# Altium PCB OBD-2 ESP32 Shield.PcbDoc
Units mm, origin at the board's own origin, x right, y up, seen from the top; angles counter-clockwise.
Board outline 59.1 x 44.1 mm, 2 copper layers (L1, L2), stack 1.58 mm thick; 40 components, 28 nets, 142 pads, 52 vias.
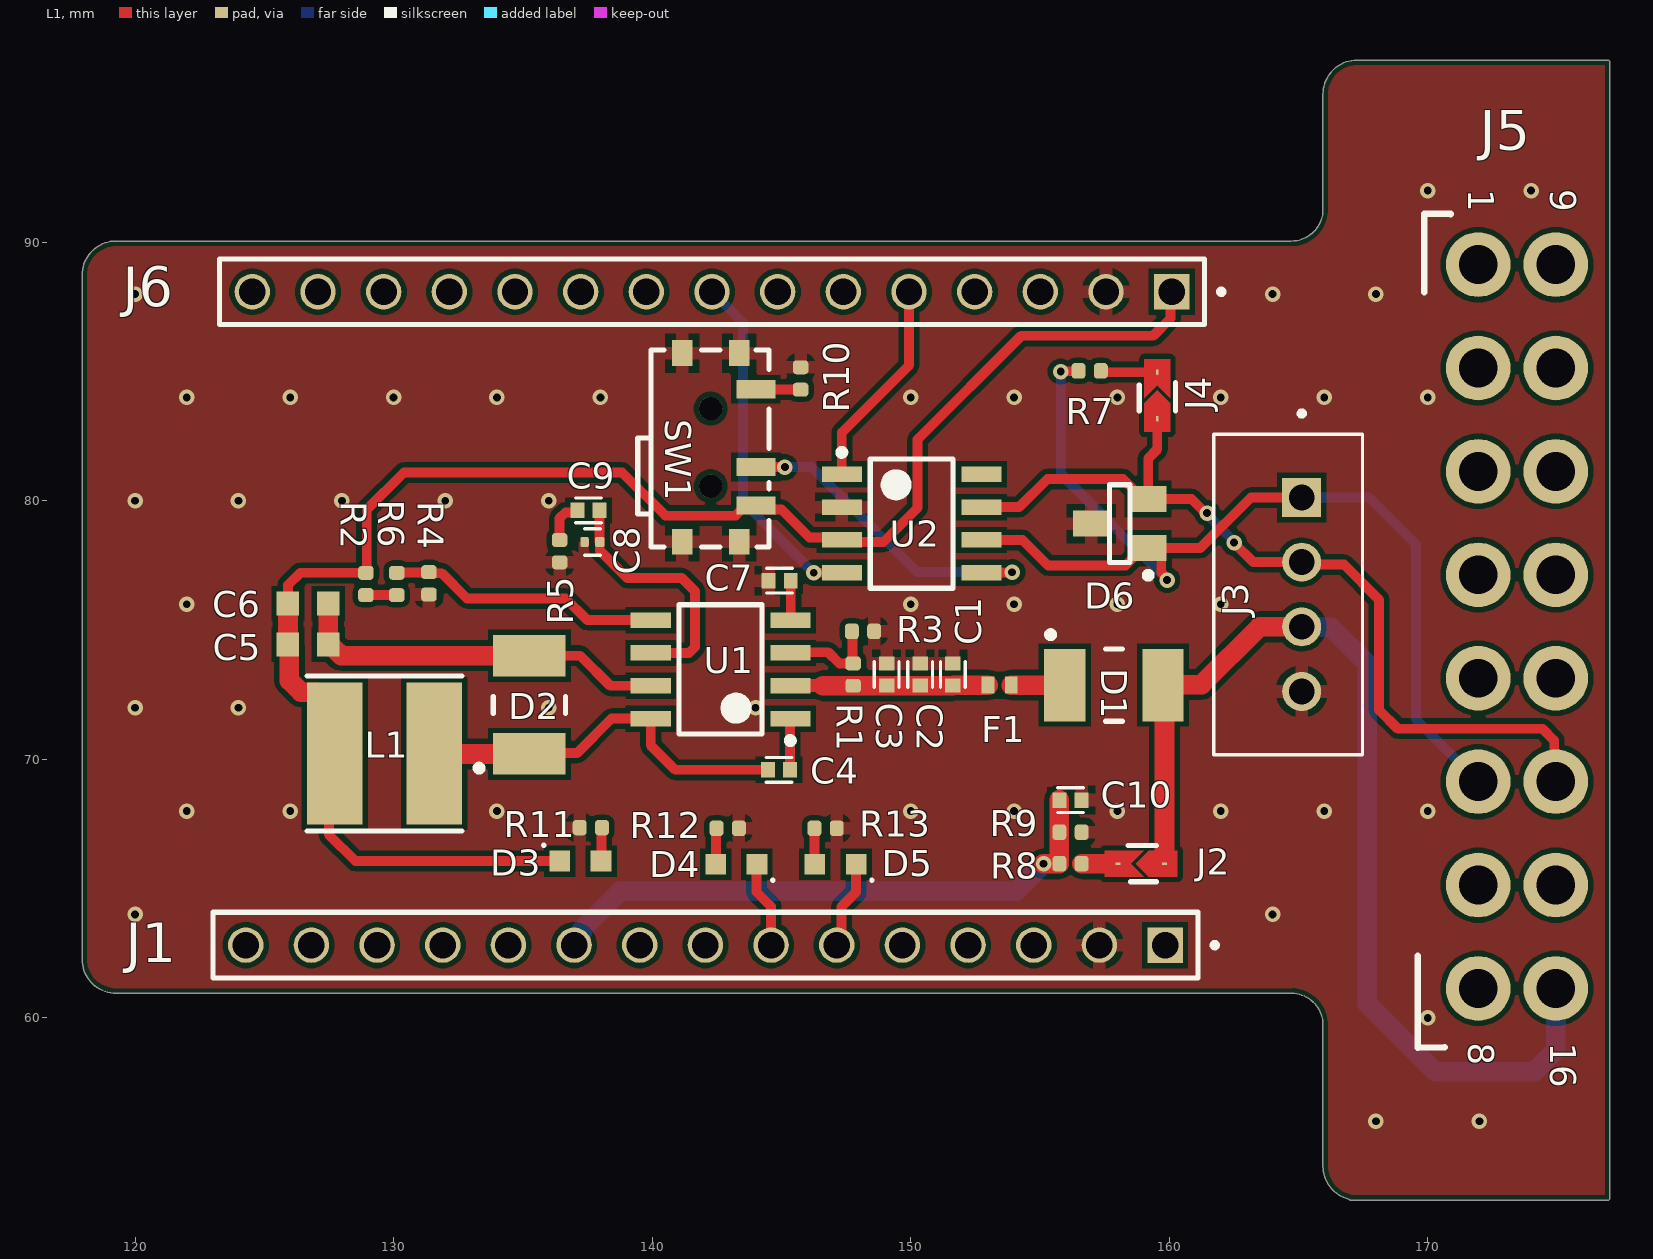
[diagram p0: L1 view]
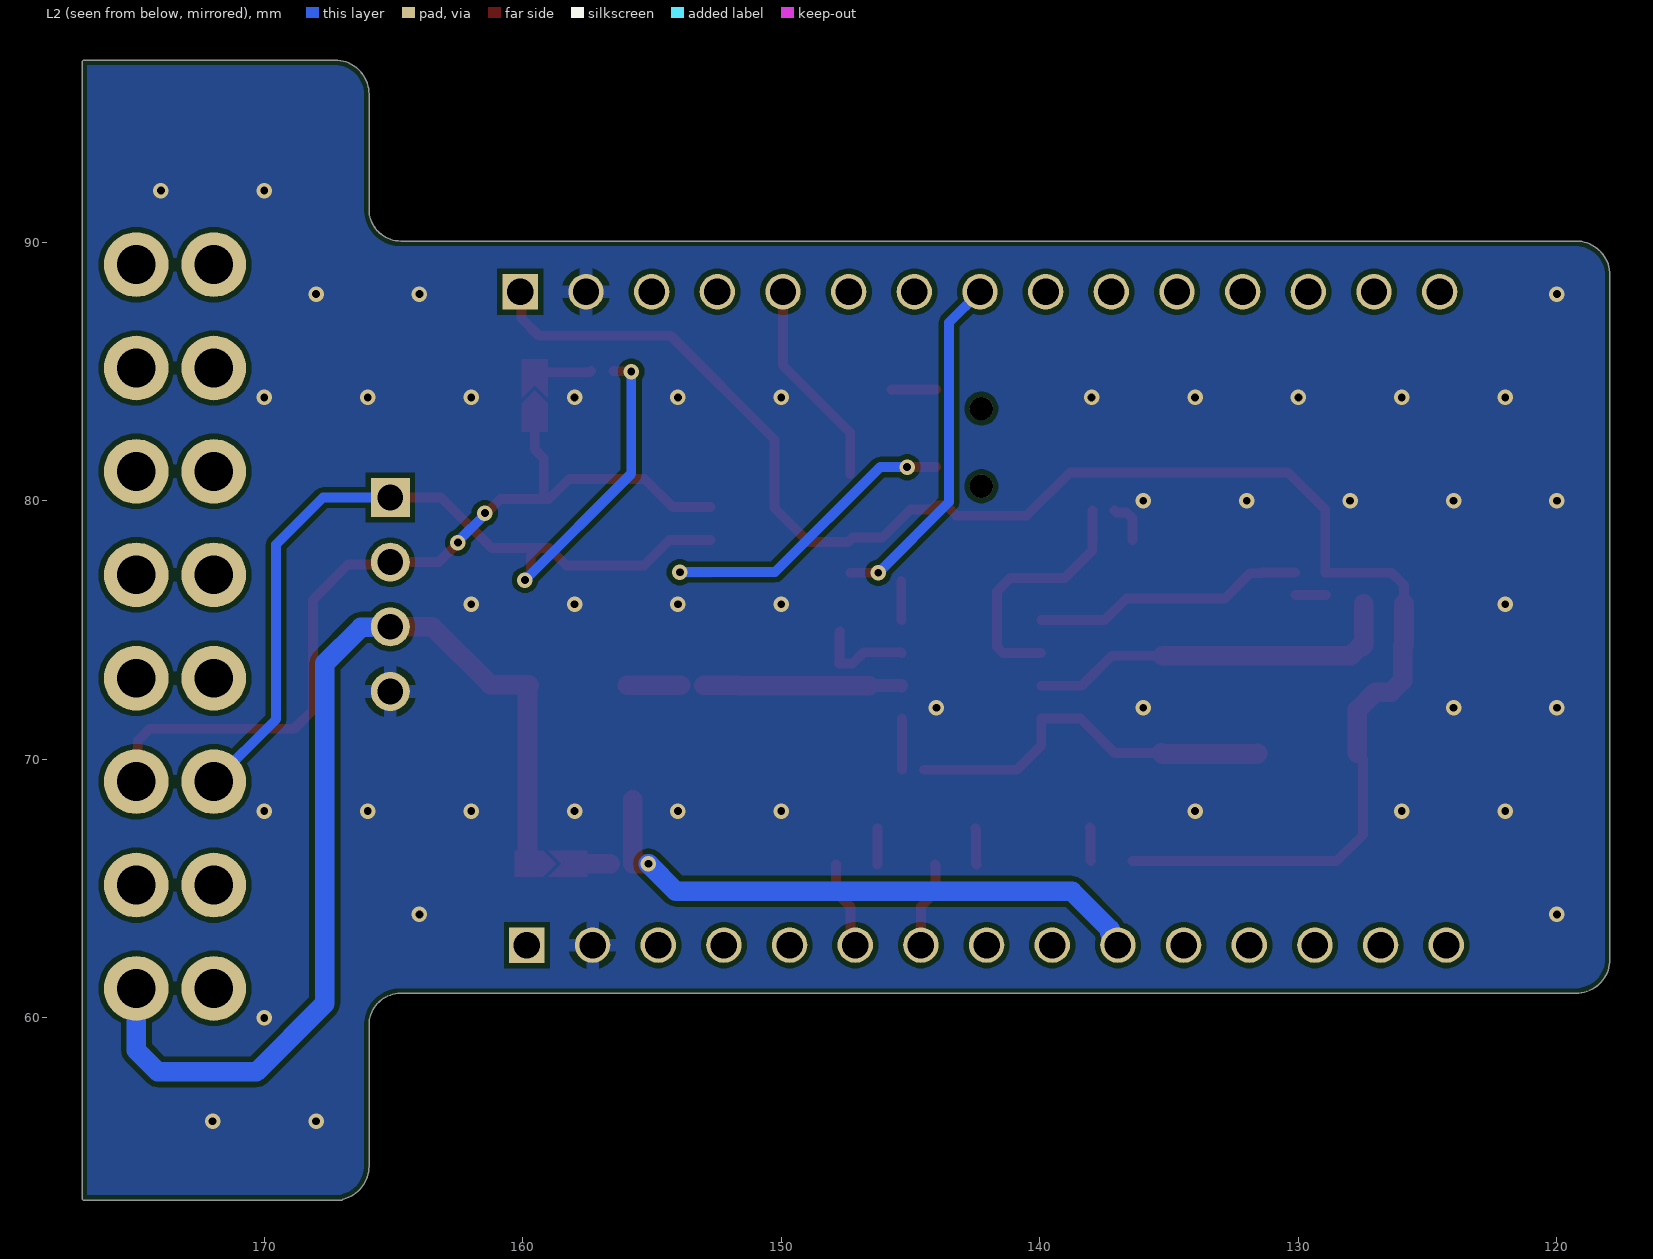
[diagram p1: L2 view, seen from below]
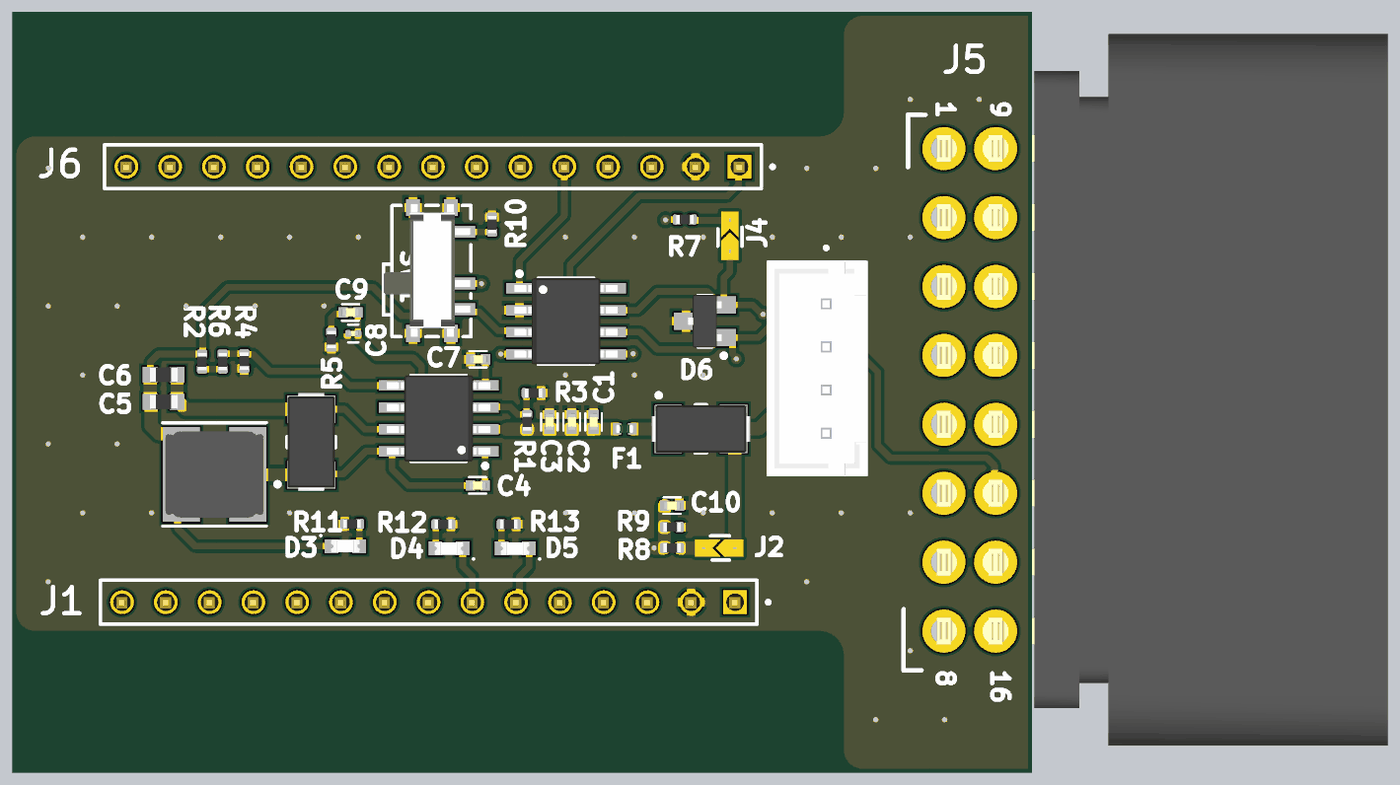
[diagram p2: 3D render of the assembled board from above, using the file's embedded part models]

## Layer stack, top to bottom
Top Solder: solder mask 0.0102, Solder Resist, Dk 3.5
L1: signal copper 0.04
Dielectric 1: dielectric 1.5, FR-4, Dk 4.8
L2: signal copper 0.04
Bottom Solder: solder mask 0.0102, Solder Resist, Dk 3.5

## Board outline
117.95,62.27 ccw(c119.27,62.27) 119.27,60.95 164.73,60.95 cw(c164.73,59.73) 165.95,59.73 165.95,54.27 ccw(c167.27,54.27) 166.951,52.989 167,52.95 177,52.95 177.05,53 177.05,97 177,97.05 167.27,97.05 ccw(c167.27,95.73) 165.95,95.73 165.95,91.27 cw(c164.73,91.27) 164.73,90.05 119.27,90.05 ccw(c119.27,88.73) 117.95,88.73

## Design rules (kind name [scope] priority, off if disabled: settings)
BoardOutlineClearance [All] p1: gap=0.2 ignorepadtopadclearanceinfootprint=FALSE except(0.4: Arc-SplitBarrior Arc-SplitContinuation Track-SplitBarrior Track-SplitContinuation SMDPad-SplitBarrior SMDPad-SplitContinuation THPad-SplitBarrior THPad-SplitContinuation Via-SplitBarrior Via-SplitContinuation Fill-SplitBarrior Fill-SplitContinuation Poly-SplitBarrior Poly-SplitContinuation Region-SplitBarrior Region-SplitContinuation Text-SplitBarrior Text-SplitContinuation)
Clearance "Clearance Bottom Layer" [OnLayer('Bottom Layer')] p1: gap=0.203 ignorepadtopadclearanceinfootprint=TRUE except(0.254: Arc-Text Track-Text SMDPad-Text THPad-Text Via-Text Fill-Text Poly-Text Region-Text Text-Text)
Clearance "Clearance Top Layer" [OnLayer('Top Layer')] p2: gap=0.203 ignorepadtopadclearanceinfootprint=TRUE except(0.254: Arc-Text Track-Text SMDPad-Text THPad-Text Via-Text Fill-Text Poly-Text Region-Text Text-Text)
Clearance [All] p3: gap=0.2 ignorepadtopadclearanceinfootprint=FALSE except(0.089: Arc-Arc Arc-Track Arc-SMDPad Track-Track Track-SMDPad SMDPad-SMDPad; 0.127: Arc-Via Track-Via SMDPad-Via THPad-Via Via-Via; 0.254: Arc-Text Track-Text SMDPad-Text THPad-Text Via-Text Fill-Text Poly-Text Region-Text Text-Text)
HoleSize [All] p1: absolutevalues=TRUE maxlimit=6.3 minlimit=0.2 maxpercent=80.000 minpercent=20.000
MinimumAnnularRing [All] p1: minimumring=0.076
MinimumSolderMaskSliver [All] p1: minsoldermaskwidth=0.1
PolygonConnect PolygonConnect_3 [All vs IsNamedPolygon('BATT_BB_L01_P002')] p1: connectstyle=Direct reliefconductorwidth=0.254 reliefentries=4 polygonreliefangle="90 Angle" airgapwidth=0.254
PolygonConnect PolygonConnect_2 [All vs IsNamedPolygon('BATT_BB_L02_P001')] p2: connectstyle=Direct reliefconductorwidth=0.254 reliefentries=4 polygonreliefangle="90 Angle" airgapwidth=0.254
PolygonConnect [All vs IsNamedPolygon('VIN_REG_L02_P000')] p3: connectstyle=Direct reliefconductorwidth=0.254 reliefentries=4 polygonreliefangle="90 Angle" airgapwidth=0.254
PolygonConnect PolygonConnect_1 [All] p4: thpad.connectstyle=Relief thpad.reliefconductorwidth=0.508 thpad.reliefentries=4 thpad.polygonreliefangle="90 Angle" thpad.airgapwidth=0.254 smdpad.connectstyle=Relief smdpad.reliefconductorwidth=0.508 smdpad.reliefentries=4 smdpad.polygonreliefangle="90 Angle" smdpad.airgapwidth=0.254 via.connectstyle=Direct via.reliefconductorwidth=0.508 via.reliefentries=4 via.polygonreliefangle="90 Angle" via.airgapwidth=0.254
RoutingCorners [All] p1: cornerstyle=Round minsetback=2.54 maxsetback=2.54
RoutingVias [All] p1: holewidth=0.5 width=1 viastyle="Through Hole" minholewidth=0.2 minwidth=0.45 maxholewidth=1 maxwidth=2
SilkToSilkClearance [All] p1: silktosilkclearance=0.1
SilkToSolderMaskClearance [IsPad] p1: minsilkscreentomaskgap=0.1 clearancetoexposedcopper=TRUE
SolderMaskExpansion [All] p1: expansion=0.102 istentingtop=FALSE
Width [All] p1: maxlimit=2.54 minlimit=0.089 preferedwidth=0.381
25 further rules are at their usual default settings.

## Components (designator, comment, footprint, x,y, rotation, side; value= is the part's Value field where it differs from the comment)
C1 "GRM155R61E475ME15D" CAP0402_1005 151.638,73.279 r270 top value=4u7
C2 "GRM155R61E475ME15D" CAP0402_1005 150.368,73.279 r270 top value=4u7
C3 "GRM155R71E103KA01D" CAP0402_1005 149.073,73.279 r270 top value=10n
C4 "GRM155R62A104KE14D" CAP0402_1005 144.907,69.596 r180 top value=100n
C5 "GRM188R60J476ME15D" RES0603_1608 126.695,74.447 r180 top value=47u
C6 "GRM188R60J476ME15D" RES0603_1608 126.695,76.022 r180 top value=47u
C7 "GRM155R71E103KA01D" CAP0402_1005 144.932,76.911 r0 top value=10n
C8 "CC0201KRX7R9BB470" CAP0201_0603 137.694,78.41 r0 top value=47p
C9 "GCM155L81H102KA37D" CAP0402_1005 137.541,79.629 r0 top value=1n
C10 "GRM155R62A104KE14D" CAP0402_1005 156.185,68.428 r180 top value=100n
D1 "B340A" SMA(DO-214AC) 157.861,72.873 r0 top
D2 "B340A" SMA(DO-214AC) 135.255,72.111 r90 top
D3 "XL-TD1608SURC" LED0603 137.224,66.065 r0 top value=Red
D4 "XL-TD1608UYC" LED0603 143.256,65.938 r180 top value=Yellow
D5 "XL-TD1608UBC" LED0603 147.091,65.938 r180 top value=Blue
D6 "NUP2105LT1G" SOT-23 158.09,79.121 r180 top
F1 "JFC0402-0500FS" "FUSE SMD 0402" 153.441,72.873 r180 top
J1 "Conn 1x15, 2.45mm" "1-ROW, 15-POSITION, 2.54MM" 159.842,62.814 r180 top locked net-tie value="Conn 1x15, 2.54mm"
J2 "Jumper" JP0603 159.817,65.964 r180 top net-tie
J3 "HCZZ0139-4" "CONNECTOR PUSH-PULL, 2.54MM" 164.603,76.378 r90 top locked
J4 "Jumper" JP0603 159.541,83.176 r90 top net-tie
J5 "OBD2 Connector" COMTECH_C-OBD-II-16M 171.955,89.139 r90 top locked
J6 "Conn 1x15, 2.45mm" "1-ROW, 15-POSITION, 2.54MM" 160.096,88.087 r180 top locked net-tie value="Conn 1x15, 2.54mm"
L1 "CY54-6.8UH" SMD,5.8X5.2MM 129.647,70.231 r180 top value=6.8u
R1 "RC0402FR-07332KL" RES0402_1005 147.777,73.279 r270 top value=332k
R2 "PA0402-R-070RL" RES0402_1005 128.93,76.784 r90 top value=0R
R3 "RC0402FR-0768K1L" RES0402_1005 148.158,74.955 r180 top value=68.1k
R4 "RT0402BRD0710K2L" RES0402_1005 130.124,76.784 r270 top value=10.2k
R5 "AT0402DRD0729K4L" RES0402_1005 136.423,78.054 r90 top value=29.4k
R6 "AT0402DRD073K24L" RES0402_1005 131.369,76.809 r90 top value=3.24k
R7 "RT0402FRE07120RL" RES0402_1005 156.925,85.027 r180 top value=120R
R8 "RC0402JR-071ML" RES0402_1005 156.185,65.964 r0 top value=1M
R9 "RC0402FR-07270KL" RES0402_1005 156.185,67.183 r180 top value=270k
R10 "RT0402DRD0710KL" RES0402_1005 145.745,84.734 r90 top value=10k
R11 "RT0402BRE071KL" RES0402_1005 137.63,67.361 r0 top value=1k
R12 "RT0402BRE071KL" RES0402_1005 142.926,67.335 r180 top value=1k
R13 "RT0402BRE071KL" RES0402_1005 146.71,67.335 r180 top value=1k
SW1 "SSSS811101" SMD-SWITCH 144.015,84.316 r270 top
U1 "TPS54331DR" SOIC-8 142.646,73.482 r180 top
U2 "SN65HVD230DR" SOIC-8 150.038,79.121 r0 top

## Footprints (in the part's own frame and the unit in brackets; to place one, negate y for a bottom-side part, rotate by r counter-clockwise, add the part's x,y. Pads: shape width x height; smd on the part's side, far side on the other; paste and mask are expansions set on the pad)
"1-ROW, 15-POSITION, 2.54MM" [mm]
  rect 1.37x1.37 / inner round 1.37 / far side rect 1.37x1.37 hole 1.02: 1(0,0)
  round 1.37 hole 1.02: 2(2.54,0) 3(5.08,0) 4(7.62,0) 5(10.16,0) 6(12.7,0) 7(15.24,0) 8(17.78,0) 9(20.32,0) 10(22.86,0) 11(25.4,0) 12(27.94,0) 13(30.48,0) 14(33.02,0) 15(35.56,0)
  silkscreen extent -2.02,-1.27 36.83,1.27, body extent -1.25,-1.24 36.85,1.3, height 8.5
CAP0201_0603 [mm]
  rrect50% 0.33x0.4 smd: 1(-0.305,0)
  rrect50% 0.38x0.4 smd: 2(0.28,0)
  silkscreen extent -0.3,-0.52 0.3,0.52, body extent -0.3,-0.15 0.3,0.15, height 0.3
CAP0402_1005 [mm]
  rect 0.54x0.6 smd: 1(-0.43,0) 2(0.43,0)
  silkscreen extent -0.5,-0.48 0.5,0.48, body extent -0.5,-0.24 0.5,0.26, height 0.5
COMTECH_C-OBD-II-16M [mm]
  round 2.5 hole 1.5: 1(0,0) 2(-4,0) 3(-8,0) 4(-12,0) 5(-16,0) 6(-20,0) 7(-24,0) 8(-28,0) 9(0,-3) 10(-4,-3) 11(-8,-3) 12(-12,-3) 13(-16,-3) 14(-20,-3) 15(-24,-3) 16(-28,-3)
  silkscreen extent -30.29,1.07 1.97,2.33, body extent -34.65,-25.75 6.65,0.4, height 2.6
"CONNECTOR PUSH-PULL, 2.54MM" [mm]
  rect 1.508x1.508 / inner round 1.508 / far side rect 1.508x1.508 hole 1: 1(3.75,-0.525)
  round 1.508 hole 1: 2(1.25,-0.525) 3(-1.25,-0.525) 4(-3.75,-0.525)
  silkscreen extent -6.2,-2.88 7.1,2.88, body extent -6.2,-2.88 6.2,2.88, height 7
"FUSE SMD 0402" [mm] "Chip Resistor, 2-Leads, Body 1.00x0.50mm, IPC Medium Density"
  rect 0.5x0.65 smd: 1(-0.45,0) 2(0.45,0)
  body extent -0.51,-0.25 0.51,0.25, height 0.51
JP0603 [mm]
  rrect50% 0.2x0.1 smd mask+0.102: 1(0,0) 2(1.8,0)
  L1 region: 0.8,0.5 1.3,0 0.8,-0.5 2.3,-0.5 2.3,0.5
  L1 region: -0.5,-0.5 -0.5,0.5 0.6,0.5 1.1,0 0.6,-0.5
  silkscreen extent 0.3,-0.7 1.4,0.7
LED0603 [mm]
  rect 0.8x0.8 smd: 1(-0.8,0) 2(0.8,0)
  silkscreen extent -1.46,0.56 -1.36,0.66, body extent -0.81,-0.36 0.84,0.37, height 0.68
RES0402_1005 [mm]
  rrect50% 0.54x0.6 smd: 1(-0.432,0) 2(0.432,0)
  body extent -0.5,-0.28 0.5,0.28, height 0.4
RES0603_1608 [mm]
  rect 0.87x0.93 smd: 1(-0.78,0) 2(0.78,0)
  body extent -0.8,-0.43 0.8,0.43, height 0.6
SMA(DO-214AC) [mm] "Molded Diode, 2-Leads, Body 5.04x2.60mm, IPC Medium Density"
  rect 1.6x2.8 smd: 1(-1.9,0) 2(1.9,0)
  silkscreen extent -2.57,-1.4 0.33,2.07, body extent -2.86,-1.38 2.86,1.38, height 2.42
SMD,5.8X5.2MM [mm]
  rect 2.15x5.5 smd: 1(-1.925,0) 2(1.925,0)
  silkscreen extent -3,-3 3,3, body extent -2.85,-2.5 2.85,2.5, height 4.7
SMD-SWITCH [mm]
  rect 0.7x1.5 smd: 1(0,0) 2(3,0) 3(4.5,0)
  rect 1x0.8 smd: 4(-1.4,-0.65) 5(5.9,-0.65) 6(5.9,-2.85) 7(-1.4,-2.85)
  round 0.9 hole 0.9 paste-1 mask-1: NC(0.75,-1.75) NC(3.75,-1.75)
  silkscreen extent -1.52,-4.57 6.1,0.51, body extent -1.61,-4.54 6.09,0.46, height 1.4
SOIC-8 [mm] "SOIC, 8-Leads, Body 4.90x3.90mm, Pitch 1.27mm, IPC Medium Density"
  rect 1.55x0.6 smd: 1(-2.7,1.905) 2(-2.7,0.635) 3(-2.7,-0.635) 4(-2.7,-1.905) 5(2.7,-1.905) 6(2.7,-0.635) 7(2.7,0.635) 8(2.7,1.905)
  silkscreen extent -2.83,-2.5 1.6,2.88, body extent -3,-2.5 3,2.5, height 1.75
SOT-23 [mm] "SOT223, 3-Leads, Body 2.92x2.37mm (avg), Pitch 1.90mm, IPC Medium Density"
  rect 1.4x1 smd: 1(-1.1,0.95) 2(-1.1,-0.95) 3(1.1,0)
  silkscreen extent -1.23,-1.5 0.4,2.12, body extent -0.97,-1.52 0.97,1.52, height 1.12

## Part data
C1 C2: "25V 4.7uF X5R 0402 Multilayer Ceramic Capacitors MLCC - SMD/SMT ROHS", LCSC Part #=C2858031, Mfr Name="Murata Electronics", Mfr.Part #=GRM155R61E475ME15D
C3 C7: "25V 10nF X7R ±10% 0402 Multilayer Ceramic Capacitors MLCC - SMD/SMT ROHS", LCSC Part #=C77013, Mfr Name="Murata Electronics", Mfr. Part #=GRM155R71E103KA01D
C4 C10: "100V 100nF X5R ±10% 0402 Multilayer Ceramic Capacitors MLCC - SMD/SMT ROHS", LCSC Part #=C162178, Mfr Name="Murata Electronics", Mfr. Part #=GRM155R62A104KE14D
C5 C6: "6.3V 47uF X5R ±20% 0603 Multilayer Ceramic Capacitors MLCC - SMD/SMT ROHS", LCSC Part #=C140782, Mfr Name="Murata Electronics", Mfr. Part #=GRM188R60J476ME15D
C8: "50V 47pF X7R ±10% 0201 Multilayer Ceramic Capacitors MLCC - SMD/SMT ROHS", LCSC Part #=C576697, Mfr Name=YAGEO, Mfr. Part #=CC0201KRX7R9BB470
C9: "50V 1nF X8L ±10% 0402 Multilayer Ceramic Capacitors MLCC - SMD/SMT ROHS", LCSC Part #=C701290, Mfr Name="Murata Electronics", Mfr. Part #=GCM155L81H102KA37D
D1 D2: "40V 3A 550mV@3A SMA(DO-214AC) Schottky Barrier Diodes (SBD) ROHS", LCSC Part #=C3018525, Mfr.Part #=B340A
D3: "5mA 无色透明透镜 620nm~625nm -30℃~+85℃ Positive post Red 30° 77.5mW 0603 Light Emitting Diodes (LED) ROHS", LCSC Part #=C965849, Mfr Name=XINGLIGHT, Mfr. Part #=XL-TD1608SURC
D4: "5mA 无色透明透镜 -30℃~+85℃ Positive post 586nm~590nm Yellow 30° 77.5mW 0603 Light Emitting Diodes (LED) ROHS", LCSC Part #=C965850, Mfr Name=XINGLIGHT, Mfr. Part #=XL-TD1608UYC
D5: "5mA 无色透明透镜 -30℃~+85℃ Positive post 466nm~472nm Blue 30° 77.5mW 0603 Light Emitting Diodes (LED) ROHS", LCSC Part #=C965853, Mfr Name=XINGLIGHT, Mfr. Part #=XL-TD1608UBC
D6: "SOT-23 Electrostatic and Surge Protection (TVS/ESD) ROHS", LCSC Part #=C2890118, Mfr.Part #=NUP2105LT1G
F1: "35A SMD Fuse 500mA 32V 32V 0402 Fuses ROHS", LCSC Part #=C136320, Mfr Name #="Shenzhen JDT", Mfr.Part #=JFC0402-0500FS
J1 J6: library part "Header Connector 1x15, 2.54mm", "Header Connector 1x15, 2.54mm"
J2 J4: "Jumer 0604"
J3: "Connector Push-Pull, 4PIN, 2.5mm", LCSC Part #=C7433739, Mfr Name="Hong Cheng", Mfr. Part #=HCZZ0139-4
J5: "16Pin, 2Row, 3.2mm, 4mm"
L1: "2.4A 6.8uH ±20% 58.5mΩ SMD,5.8x5.2mm Inductors (SMD) ROHS", LCSC Part #=C2929430, Mfr Name="SHOU HAN", Mfr. Part #=CY54-6.8UH
R1: "62.5mW Thick Film Resistors 50V ±100ppm/℃ ±1% 332kΩ 0402 Chip Resistor - Surface Mount ROHS", LCSC Part #=C138005, Mfr Name=YAGEO, Mfr.Part #=RC0402FR-07332KL
R2: "62.5mW ±150ppm/℃ 0Ω 0402 Chip Resistor - Surface Mount ROHS", LCSC Part #=C4044221, Mfr Name=YAGEO, Mfr. Part #=PA0402-R-070RL
R3: "62.5mW Thick Film Resistors 50V ±100ppm/℃ ±1% 68.1kΩ 0402 Chip Resistor - Surface Mount ROHS", LCSC Part #=C276276, Mfr Name=YAGEO, Mfr.Part #=RC0402FR-0768K1L
R4: "62.5mW Thin Film Resistor 50V ±25ppm/℃ ±0.1% 10.2kΩ 0402 Chip Resistor - Surface Mount ROHS", LCSC Part #=C852479, Mfr Name=YAGEO, Mfr. Part #=RT0402BRD0710K2L
R5: "63mW Thin Film Resistor ±0.5% ±25ppm/℃ 29.4kΩ 0402 Chip Resistor - Surface Mount ROHS", LCSC Part #=C851325, Mfr Name=YAGEO, Mfr. Part #=AT0402DRD0729K4L
R6: "63mW Thin Film Resistor ±0.5% ±25ppm/℃ 3.24kΩ 0402 Chip Resistor - Surface Mount ROHS", LCSC Part #=C851383, Mfr Name=YAGEO, Mfr. Part #=AT0402DRD073K24L
R7: "62.5mW Thin Film Resistor ±50ppm/℃ ±1% 120Ω 0402 Chip Resistor - Surface Mount ROHS", LCSC Part #=C854098, Mfr Name=YAGEO, Mfr. Part #=RT0402FRE07120RL
R8: "62.5mW Thick Film Resistors 50V ±100ppm/℃ ±5% 1MΩ 0402 Chip Resistor - Surface Mount ROHS", LCSC Part #=C93949, Mfr Name=YAGEO, Mfr. Part #=RC0402JR-071ML
R9: "62.5mW Thick Film Resistors 50V ±100ppm/℃ ±1% 270kΩ 0402 Chip Resistor - Surface Mount ROHS", LCSC Part #=C163475, Mfr Name=YAGEO, Mfr. Part #=RC0402FR-07270KL
R10: "62.5mW Thin Film Resistor ±0.5% ±25ppm/℃ 10kΩ 0402 Chip Resistor - Surface Mount ROHS", LCSC Part #=C853514, Mfr Name=YAGEO, Mfr. Part #=RT0402DRD0710KL
R11 R12 R13: "62.5mW Thin Film Resistor 50V ±50ppm/℃ ±0.1% 1kΩ 0402 Chip Resistor - Surface Mount ROHS", LCSC Part #=C513664, Mfr Name=YAGEO, Mfr. Part #=RT0402BRE071KL
SW1: "300mA Surface Mount，Right Angle SPDT 5V 1万次 SMD Slide Switches ROHS", LCSC Part #=C109335, Mfr.Part #=SSSS811101
U1: "Step-down type Adjustable 800mV~25V 3A 3.5V~28V SOIC-8 DC-DC Converters ROHS", LCSC Part #=C9865, Mfr.Part #=TPS54331DR
U2: "1Mbps Transceiver SOIC-8 CAN ICs ROHS", LCSC Part #=C12084, Mfr.Part #=SN65HVD230DR

## Via types
v1: diameter 0.6, hole 0.3, L1 to L2, tented both sides, 44 vias
v2: diameter 0.6, hole 0.3, L1 to L2, 8 vias

## Nets (pads, with @x,y where several pads share a name; then routed paths per layer and width w, separated by ;. In a path a pad name is that pad's centre, name@x,y a point inside that pad or via, vN(x,y) a via of type N, cw(c..) or ccw(c..) an arc to the next point about the centre after c; other vN are vias at no path point)
ADC: C10.2 J1.10 R8.1 R9.2 | length 22.7
  L1 w0.762: v2(155.143,65.964) R8.1 C10.2@155.753,68.426
  L2 w0.762: J1.10 136.982,62.979 137.286,63.283 137.286,63.423 138.76,64.897 154.076,64.897 v2(155.143,65.964)
CAN_H: D6.1 J3.1 J5.6 R7.2 U2.6 | length 41.1
  L1 w0.381: U2.6 154.33,78.486 155.321,77.495 158.314,77.495 158.99,78.171 D6.1 D6.1@159.383,78.171 ; v2(155.808,85.002) 155.82,85.015 156.481,85.015 R7.2 ; v2(159.918,76.937) 159.918,76.996 159.693,77.221 159.693,77.861 D6.1@159.383,78.171 ; J3.1 163.16,80.128 161.204,78.171 D6.1@159.383,78.171
  L2 w0.381: v2(155.808,85.002) 155.808,81.047 v2(159.918,76.937) ; J3.1 167.725,80.128 169.545,78.308 169.545,71.549 J5.6
CAN_L: D6.2 J3.2 J4.1 J5.14 U2.7 | length 34.4
  L1 w0.381: U2.7 154.203,79.756 155.296,80.848 158.212,80.848 158.99,80.071 D6.2 ; J4.1@159.541,83.118 159.541,81.995 159.19,81.643 D6.2 ; J4.1 159.541,83.42 ; v2(161.468,79.527) 161.409,79.527 160.865,80.071 D6.2 ; v2(162.509,78.384) 162.509,78.373 163.254,77.628 J3.2 165.219,77.537 166.76,77.537 168.123,76.175 168.123,71.907 168.843,71.187 174.444,71.187 174.893,70.737 174.893,69.201 J5.14
  L2 w0.381: v2(161.468,79.527) 161.468,79.477 162.509,78.435 v2(162.509,78.384)
GND: C1.1 C2.1 C3.1 C7.1 C8.1 C10.1 D6.3 J1.2 J3.4 J6.2 R3.1 R5.1 R6.1 R9.1 R10.2 R11.1 R12.1 R13.1 SW1.4 SW1.5 SW1.6 SW1.7 U2.2
  other v1: 168,56 172,56 170,60 120,64 164,64 122,68 126,68 134,68 150,68 154,68 158,68 162,68 166,68 170,68 120,72 124,72 136,72 144,72 122,76 150,76 154,76 158,76 162,76 120,80 124,80 128,80 132,80 136,80 122,84 126,84 130,84 134,84 138,84 150,84 154,84 158,84 162,84 166,84 170,84 120,88 164,88 168,88 170,92 174,92
GPIO4: J6.5 U2.1 | length 8.1
  L1 w0.381: U2.1 147.338,82.644 149.936,85.242 J6.5
GPIO5: J6.8 U2.4 | length 13.6
  L1 w0.381: v2(146.253,77.216) U2.4
  L2 w0.381: J6.8 143.51,86.893 143.51,79.959 v2(146.253,77.216)
LED1: D4.1 J1.7 | length 3.4
  L1 w0.381: D4.1 144.043,65.926 144.043,64.872 144.602,64.313 J1.7
LED2: D5.1 J1.6 | length 3.4
  L1 w0.381: J1.6 147.331,63.003 147.331,64.299 147.891,64.859 D5.1
NetC1_2: C1.2 C2.2 C3.2 F1.2 R1.2 U1.2 | length 7.5
  L1 w0.508: U1.2 145.867,72.858 145.885,72.858 146.406,72.847
  L1 w0.762: 146.609,72.847 R1.2 147.779,72.849 C3.2 C2.2 C1.2 151.662,72.873 F1.2
NetC4_1: C4.1 U1.1 | length 2
  L1 w0.381: C4.1 145.337,71.568 U1.1
NetC4_2: C4.2 D2.1 L1.1 U1.8 | length 14.9
  L1 w0.381: D2.1@135.297,70.252 137.105,70.252 138.43,71.577 U1.8 139.946,70.543 140.894,69.596 C4.2
  L1 w0.762: L1.1 131.592,70.211 D2.1 D2.1@135.297,70.252
NetC5_1: C5.1 C6.1 D2.2 U1.7 | length 14.7
  L1 w0.381: D2.2 137.216,74.011 138.379,72.847 U1.7
  L1 w0.762: C6.1 127.475,74.417 127.529,74.363 127.623,74.363 127.976,74.011 D2.2
NetC7_2: C7.2 U1.4 | length 1.5
  L1 w0.381: U1.4 145.362,75.403 C7.2
NetC8_2: C8.2 C9.2 U1.6 | length 9.9
  L1 w0.381: C9.2 137.971,78.421 137.974,78.419 137.974,78.079 139.04,77.013 141.148,77.013 141.656,76.505 141.656,74.34 141.433,74.117 U1.6
NetC9_1: C9.1 R5.2 | length 1.7
  L1 w0.381: R5.2 136.423,79.328 136.647,79.551 137.033,79.551 C9.1
NetD1_1: D1.1 F1.1 | length 2.1
  L1 w0.762: F1.1 D1.1
NetD3_2: D3.2 R11.2 | length 1.3
  L1 w0.381: D3.2 138.043,66.085 138.043,67.342 R11.2
NetD4_2: D4.2 R12.2 | length 1.4
  L1 w0.381: D4.2 142.475,65.957 142.475,67.317 R12.2
NetD5_2: D5.2 R13.2 | length 1.4
  L1 w0.381: R13.2 146.285,67.329 146.285,65.945 D5.2
NetJ2_2: J2.2 R8.2 | length 1.4
  L1 w0.762: R8.2 J2.2
NetJ4_2: J4.2 R7.1 | length 2.2
  L1 w0.381: R7.1 157.408,84.976 J4.2
NetR1_1: R1.1 R3.2 U1.3 | length 3.8
  L1 w0.381: U1.3 145.372,74.143 146.812,74.143 147.244,73.711 R1.1 ; R3.2 147.752,74.93 R1.1@147.752,73.737
NetR2_1: R2.1 R4.2 | length 1.2
  L1 w0.381: R2.1 R4.2
NetR4_1: R4.1 R6.2 U1.5 | length 10.6
  L1 w0.381: R4.1 130.137,77.229 131.356,77.229 R6.2 131.409,77.201 131.866,77.201 132.842,76.225 136.652,76.225 137.49,75.387 U1.5
NetR10_1: R10.1 SW1.1 | length 1.8
  L1 w0.381: SW1.1 144.022,84.309 145.738,84.309 R10.1 R10.1@145.72,84.277
NetSW1_2: SW1.2 U2.5 | length 12.6
  L1 w0.381: SW1.2 144.021,81.311 145.13,81.311 v2(145.136,81.305) ; U2.5 v2@153.721,77.216
  L2 w0.381: v2(145.136,81.305) 146.177,81.305 150.241,77.241 v2(153.924,77.241)
VBAT: D1.2 J2.1 J3.3 J5.16 | length 40.6
  L1 w0.762: J2.1 159.817,72.817 D1.2 159.779,72.891 161.258,72.891 163.494,75.128 J3.3
  L2 w0.762: J3.3 165.148,75.108 166.268,75.108 167.662,73.714 167.662,60.557 170.307,57.912 174.117,57.912 174.951,58.746 174.951,61.134 J5.16
VCC: C5.2 C6.2 D3.1 J6.1 L1.2 R2.2 SW1.3 U2.3 | length 65.2
  L1 w0.381: C6.2 125.915,76.741 126.39,77.216 R2.2 ; L1.2 127.508,70.017 127.508,67.081 128.524,66.065 D3.1 ; R2.2@128.96,77.216 128.96,79.659 130.404,81.102 138.836,81.102 140.513,79.426 143.225,79.426 143.615,79.816 SW1.3 144.173,79.659 145.004,79.659 146.085,78.578 147.246,78.578 147.414,78.41 148.946,78.41 150.266,79.731 150.266,82.372 154.28,86.385 159.385,86.385 160.053,87.054 160.053,88.044 J6.1
  L1 w0.762: C6.2 C5.2 125.969,74.393 125.969,73.046 126.416,72.6 127.028,72.6 127.722,71.906 L1.2
pads on no net: J1.1 J1.3 J1.4 J1.5 J1.8 J1.9 J1.11 J1.12 J1.13 J1.14 J1.15 J5.1 J5.2 J5.3 J5.4 J5.5 J5.7 J5.8 J5.9 J5.10 J5.11 J5.12 J5.13 J5.15 J6.3 J6.4 J6.6 J6.7 J6.9 J6.10 J6.11 J6.12 J6.13 J6.14 J6.15 SW1.NC U2.8

## Polygon pours and split planes (outlines as drawn)
GND on L1 "GND_L01_P000" (solid, pour order 0): 117.95,62.27 ccw(c119.27,62.27) 119.27,60.95 164.73,60.95 cw(c164.73,59.73) 165.95,59.73 165.95,54.27 ccw(c167.27,54.27) 166.951,52.989 167,52.95 177,52.95 177.05,53 177.05,97 177,97.05 167.27,97.05 ccw(c167.27,95.73) 165.95,95.73 165.95,91.27 cw(c164.73,91.27) 164.73,90.05 119.27,90.05 ccw(c119.27,88.73) 117.95,88.73
GND on L2 "GND_L02_P001" (solid, pour order 1): 117.95,62.27 ccw(c119.27,62.27) 119.27,60.95 164.73,60.95 cw(c164.73,59.73) 165.95,59.73 165.95,54.27 ccw(c167.27,54.27) 166.951,52.989 167,52.95 177,52.95 177.05,53 177.05,97 177,97.05 167.27,97.05 ccw(c167.27,95.73) 165.95,95.73 165.95,91.27 cw(c164.73,91.27) 164.73,90.05 119.27,90.05 ccw(c119.27,88.73) 117.95,88.73

## Silkscreen, mask and mechanical layers (free items; w line width, h text height)
Board Shape:
  lines w0.1: 167,53 177,53 177,95 177,97 167.27,97 ccw(c167.27,95.73) 166,95.73 166,93.73 166,91.27 cw(c164.73,91.27) 164.73,90 119.27,90 ccw(c119.27,88.73) 118,88.73 118,62.27 ccw(c119.27,62.27) 119.27,61 164.73,61 cw(c164.73,59.73) 166,59.73 166,54.27 ccw(c167.27,54.27) 167.27,53

## Text inside footprints (layer, text, board x,y; h text height)
J5: Top Overlay "8" at 171.574,59.04 h1 r270; Top Overlay "16" at 174.749,59.04 h1 r270; Top Overlay "9" at 174.749,92.06 h1 r270; Top Overlay "1" at 171.574,92.06 h1 r270